# Altium PCB tsalledboard.PcbDoc
Units mm, origin at the board's own origin, x right, y up, seen from the top; angles counter-clockwise.
Board outline 43 x 23 mm, 2 copper layers (Top Layer, Bottom Layer); 10 components, 10 nets, 31 pads, 2 vias.
Unrouted connection lines stored in the file: 2.
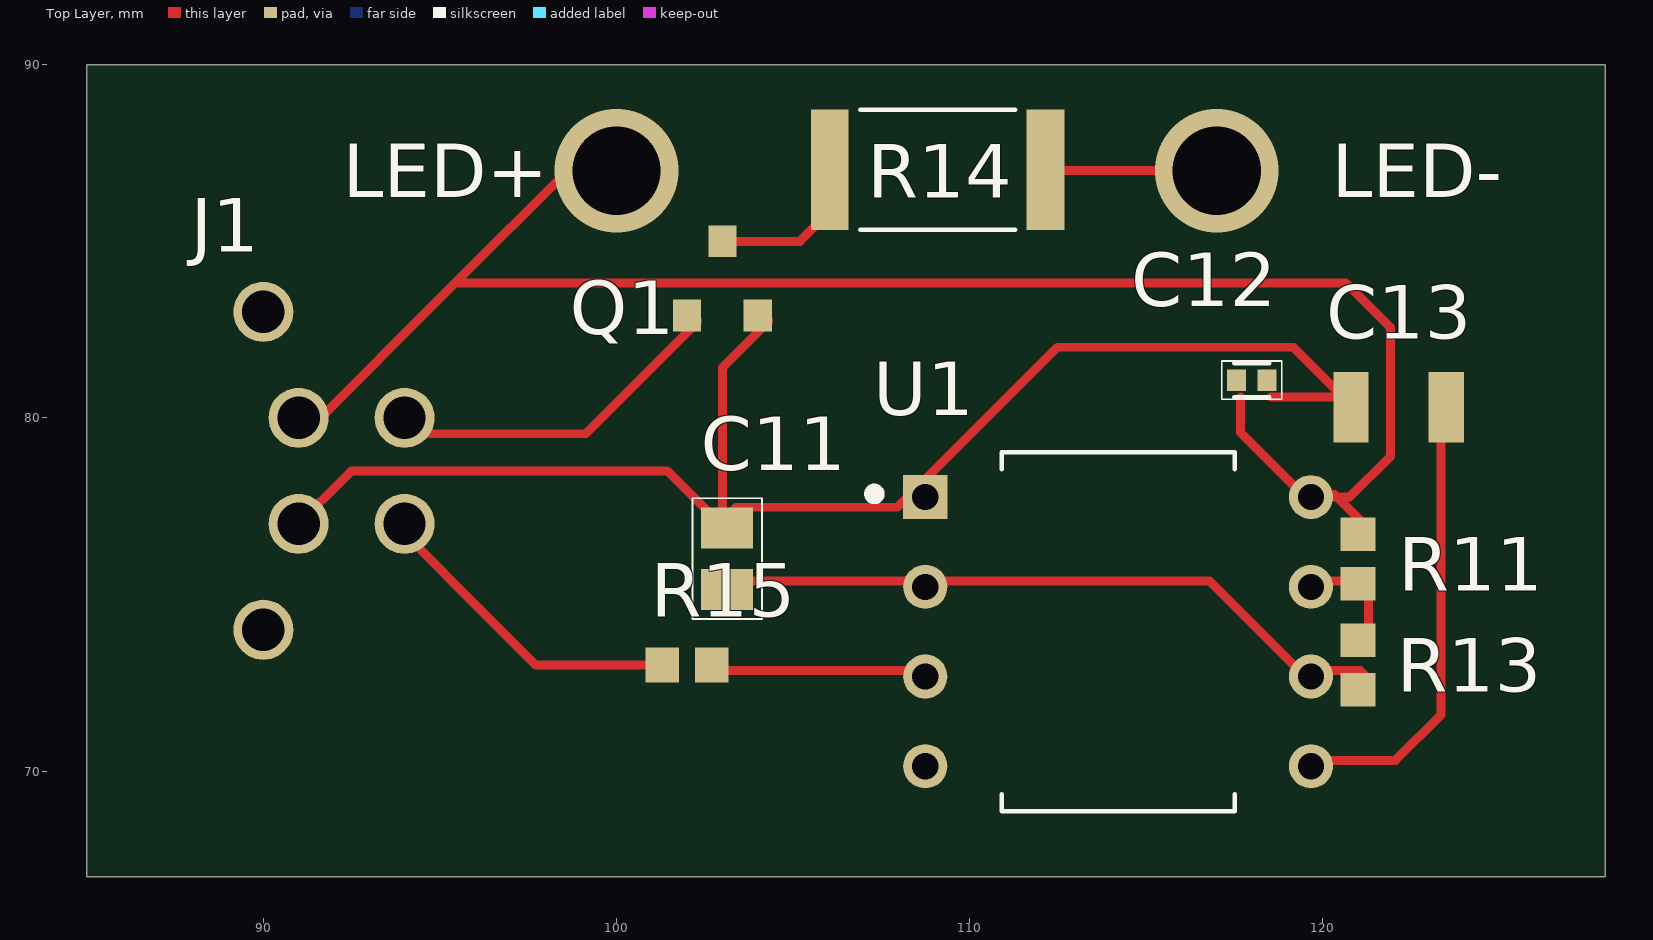
[diagram p0: Top Layer view]
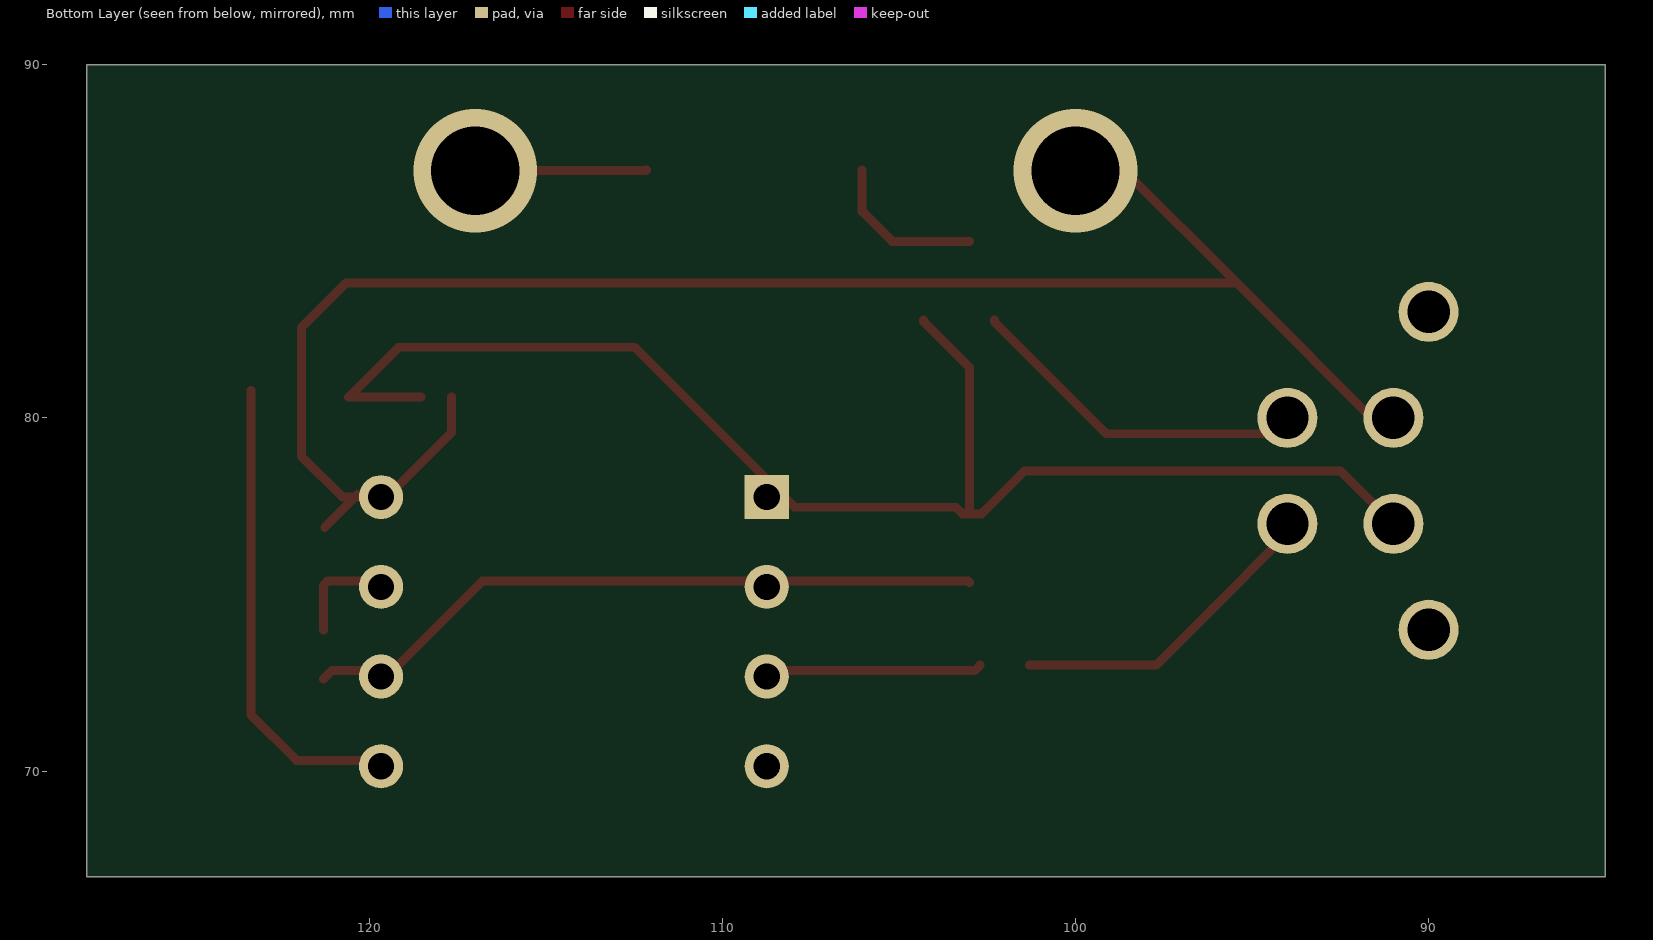
[diagram p1: Bottom Layer view, seen from below]
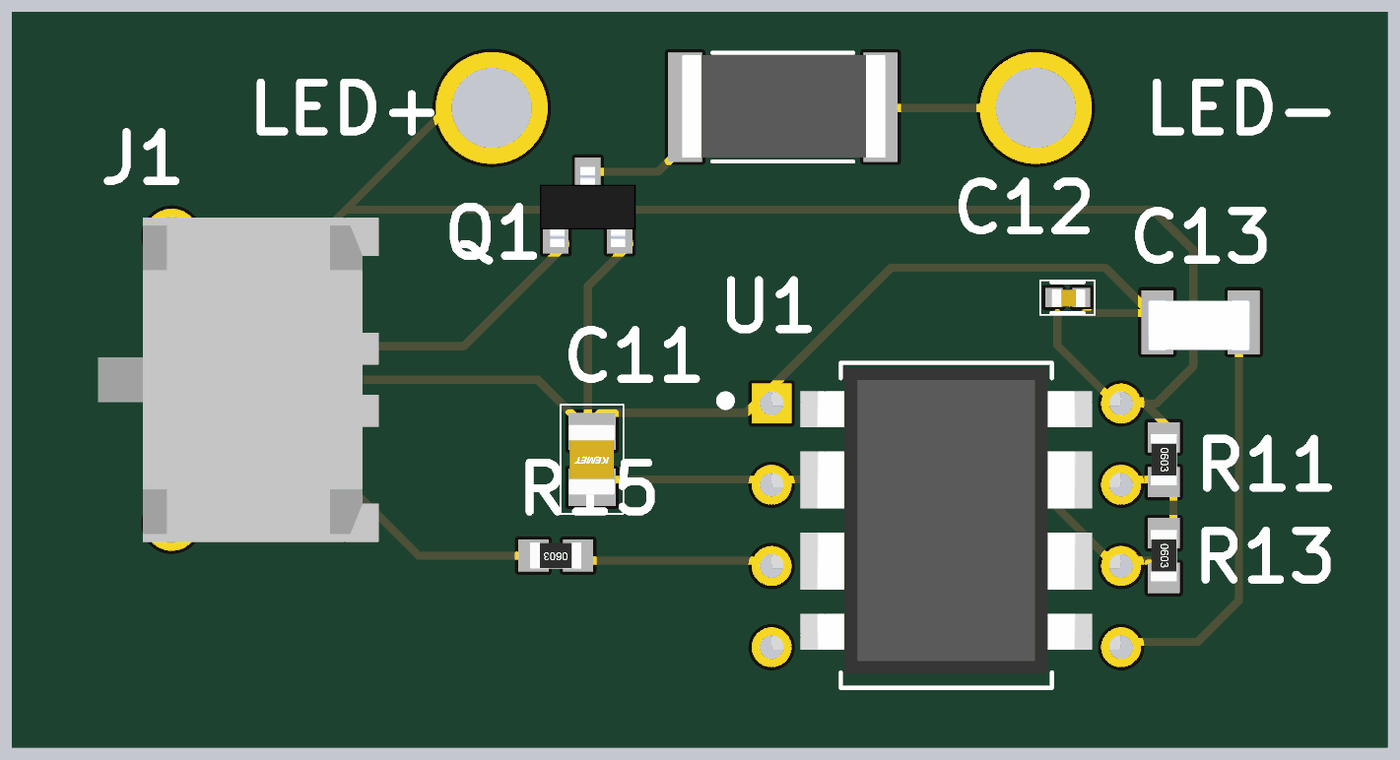
[diagram p2: 3D render of the assembled board from above, using the file's embedded part models]

## Layer stack, top to bottom
Top Solder: solder mask 0.0102, Solder Resist, Dk 3.5
Top Layer: signal copper 0.0356
Dielectric 1: dielectric 0.32, FR-4, Dk 4.8
Bottom Layer: signal copper 0.0356
Bottom Solder: solder mask 0.0102, Solder Resist, Dk 3.5

## Board outline
85,67 85,90 128,90 128,67

## Design rules (kind name [scope] priority, off if disabled: settings)
Clearance [All] p1: gap=0.254 ignorepadtopadclearanceinfootprint=FALSE except(0: Arc-Hole Track-Hole SMDPad-Hole THPad-Hole Via-Hole Fill-Hole Poly-Hole Region-Hole Text-Hole)
PolygonConnect [All] p1: connectstyle=Relief reliefconductorwidth=0.254 reliefentries=4 polygonreliefangle="90 Angle" airgapwidth=0.254
RoutingVias [All] p1: holewidth=0.711 width=1.27 viastyle="Through Hole" minholewidth=0.711 minwidth=1.27 maxholewidth=0.711 maxwidth=1.27
SolderMaskExpansion [All] p1: expansion=0.102 istentingtop=FALSE
Width [All] p1: maxlimit=0.254 minlimit=0.254 preferedwidth=0.254
30 further rules are at their usual default settings.

## Components (designator, comment, footprint, x,y, rotation, side; value= is the part's Value field where it differs from the comment)
C11 "10uF" "CAPACITOR 0805" 103,76 r270 top
C12 "0.1uF" "CAP 0402" 118,81 r180 top
C13 "0.01uF" "CAP 1206" 122,79 r0 top
J1 "0430450412" 0430450412 92,78 r90 top
Q1 "MMBT2222A-7-F" MMBT2222A 103,83 r0 top
R11 "4.99K" "Resistor 0603" 121,76 r270 top
R13 "ERJ-3EKF1502V" "Resistor 0603" 121,73 r270 top
R14 "68 ohm 2 watts" CRGP2512F68R 109,87 r180 top
R15 "2.05k" "Resistor 0603" 102,73 r180 top
U1 "NE555P" NE555P 114,74 r0 top

## Footprints (in the part's own frame and the unit in brackets; to place one, negate y for a bottom-side part, rotate by r counter-clockwise, add the part's x,y. Pads: shape width x height; smd on the part's side, far side on the other; paste and mask are expansions set on the pad)
0430450412 [mm]
  round 1.7 hole 1.2: 1(2,-2) 2(-1,-2) 3(2,1) 4(-1,1)
  round 1.7 hole 1.2 unplated: 24(-4,2) 25(5,2)
  body extent -4.57,-4.47 5.58,4.3, height 9.92
"CAP 0402" [mm]
  rect 0.54x0.6 smd: 1(-0.422,-0.068) 2(0.438,-0.068)
  silkscreen extent -0.84,-0.61 0.86,0.47, body extent -0.55,-0.32 0.5,0.23, height 0.56
"CAP 1206" [mm]
  rect 1x2 smd: 1(-1.2,1.3) 2(1.5,1.3)
  body extent -1.5,0.4 1.7,2, height 0.96
"CAPACITOR 0805" [mm]
  rect 1.16x1.47 smd: 1(-0.888,0.135) 2(0.862,0.135)
  silkscreen extent -1.72,-0.85 1.7,1.12, body extent -1.1,-0.6 1.1,0.85, height 1.01
CRGP2512F68R [mm]
  rect 1.07x3.42 smd: 1(-3.152,-0.025) 2(2.958,-0.025)
  silkscreen extent -2.3,-1.73 2.1,1.67, body extent -3.3,-1.65 3.05,1.55, height 0.66
MMBT2222A [mm]
  rect 0.8x0.9 smd: 1(0,2) 2(-1,-0.1) 3(1,-0.1)
  body extent -1.5,-0.35 2.3,2.15, height 1.11
NE555P [mm]
  rect 1.248x1.248 hole 0.74: 1(-5.255,3.756)
  round 1.248 hole 0.74: 2(-5.255,1.216) 3(-5.255,-1.324) 4(-5.255,-3.864) 5(5.665,-3.864) 6(5.665,-1.324) 7(5.665,1.216) 8(5.665,3.756)
  silkscreen extent -6.84,-5.13 3.51,5.03, body extent -5.26,-4.69 5.66,4.89, height 4.58
"Resistor 0603" [mm]
  rect 0.95x1 smd: 1(-0.7,0) 2(0.7,0)
  body extent -0.8,-0.41 0.8,0.41, height 0.45

## Part data
C11: library part C0805C106K8PACTU, "Capacitor, Ceramic, 10UF 10V X5R 0805"
C12: library part C0402C104K3RAC7867, "Capacitor 0.1µF ±10% 25V Ceramic X7R 0402 (1005 Metric)"
C13: library part GRM3195C1H113JA01D, "Capacitor Ceramic 0.011UF 50V C0G/NP0 1206"
J1: "Connector Header Through Hole 4 position 0.118\" (3.00mm)", ComponentLink1Description=Datasheet, ComponentLink1URL=https://www.molex.com/pdm_docs/sd/430450412_sd.pdf, ComponentLink2Description=Supplier, ComponentLink2URL=https://www.digikey.com/product-detail/en/molex/0430450412/WM1790-ND/252503
Q1: "Transistor Bipolar NPN 40V 600mA 300MHz 310mW Surface Mount SOT-23-3"
R11: library part ERJ-3EKF4991V, "Resistor, 4.99k ohms, 0603, SMD"
R13: "Resistor, 15K ohms, 0603, SMD"
R14: library part CRGP2512F68R, "Thick Film Resistors - SMD CRGP 2512 68R 1% SMD Resistor"
R15: library part ERJ-3EKF2051V, "Resistor, 2.05K ohms, 0603, SMD", ComponentLink1Description=Supplier, ComponentLink1URL=https://www.digikey.cn/product-detail/zh/panasonic-electronic-components/ERJ-3EKF2051V/P2-05KHCT-ND/198220, ComponentLink2Description=Datasheet, ComponentLink2URL=https://industrial.panasonic.com/cdbs/www-data/pdf/RDA0000/AOA0000C304.pdf
U1: "IC, 555 Type, Timer/Oscillator, IC 100kHz 8-PDIP"

## Via types
v1: diameter 3.5, hole 2.5, Top Layer to Bottom Layer, 2 vias

## Nets (pads, with @x,y where several pads share a name; then routed paths per layer and width w, separated by ;. In a path a pad name is that pad's centre, name@x,y a point inside that pad or via, vN(x,y) a via of type N, cw(c..) or ccw(c..) an arc to the next point about the centre after c; other vN are vias at no path point)
12V+: C12.2 J1.3 R11.1 U1.8 | length 51.4
  Top Layer w0.254: J1.3@91.17,79.55 95.44,83.82 ; v1(100,87) 98.62,87 95.44,83.82 ; 117.672,80.586 117.672,79.582 U1.8@119.33,77.924 ; U1.8 119.834,77.756 120.335,77.756 120.756,77.756 121.92,78.92 121.92,82.55 120.65,83.82 95.44,83.82 ; U1.8@119.665,77.825 119.429,77.825 U1.8@119.33,77.924 ; R11.1@121.26,76.9 120.335,77.825 119.764,77.825 119.665,77.924 119.429,77.924 U1.8@119.33,77.924
12V-: C11.1 C12.1 C13.1 J1.4 Q1.3 U1.1 | length 42.2
  Top Layer w0.254: J1.4@91.447,76.827 90.827,76.827 92.5,78.5 101.438,78.5 102.66,77.278 C11.1@103.005,77.278 ; Q1.3@104.3,82.775 104.3,82.725 103.005,81.43 C11.1@103.005,77.278 ; 118.532,80.586 120.582,80.586 119.168,82 112.486,82 108.494,78.007 107.955,77.469 103.386,77.469 103.196,77.278 C11.1@103.005,77.278
LED-: R14.1 | length 4.9
  Top Layer w0.254: R14.1 112.177,87 v1(117,87)
LedOn: J1.1 Q1.2 | length 9.5
  Top Layer w0.254: J1.1@94.17,79.55 99.125,79.55 102.3,82.725 Q1.2@102.3,82.775
NetC11_2: C11.2 R13.2 U1.2 U1.6 | length 19.5
  Top Layer w0.254: C11.2@103.005,75.338 103.051,75.384 108.41,75.384 116.79,75.384 119.33,72.844 121.056,72.844 R13.2@121.3,72.6
NetC13_2: C13.2 U1.5 | length 13.7
  Top Layer w0.254: U1.5@119.33,70.304 122.054,70.304 123.35,71.6 C13.2@123.35,80.772
NetQ1_1: Q1.1 R14.2 | length 4.6
  Top Layer w0.254: Q1.1 105.192,85 106.042,85.85 R14.2
NetR11_2: R11.2 R13.1 U1.7 | length 3.3
  Top Layer w0.254: U1.7@119.33,75.384 121.169,75.384 121.3,75.253 R13.1@121.3,74
NetR15_1: R15.1 U1.3 | length 5.8
  Top Layer w0.254: R15.1 102.856,72.844 U1.3@108.41,72.844
opto: J1.2 R15.2 | length 8.6
  Top Layer w0.254: J1.2@94.17,76.55 96.118,74.602 97.72,73 R15.2
pads on no net: J1.24 J1.25 U1.4

## Silkscreen, mask and mechanical layers (free items; w line width, h text height)
Top Overlay:
  text "LED+" at 92.254,86.254 h1.52
  text "LED-" at 120.254,86.254 h1.52